# EAGLE board PCB (EAGLE 9.6.2)
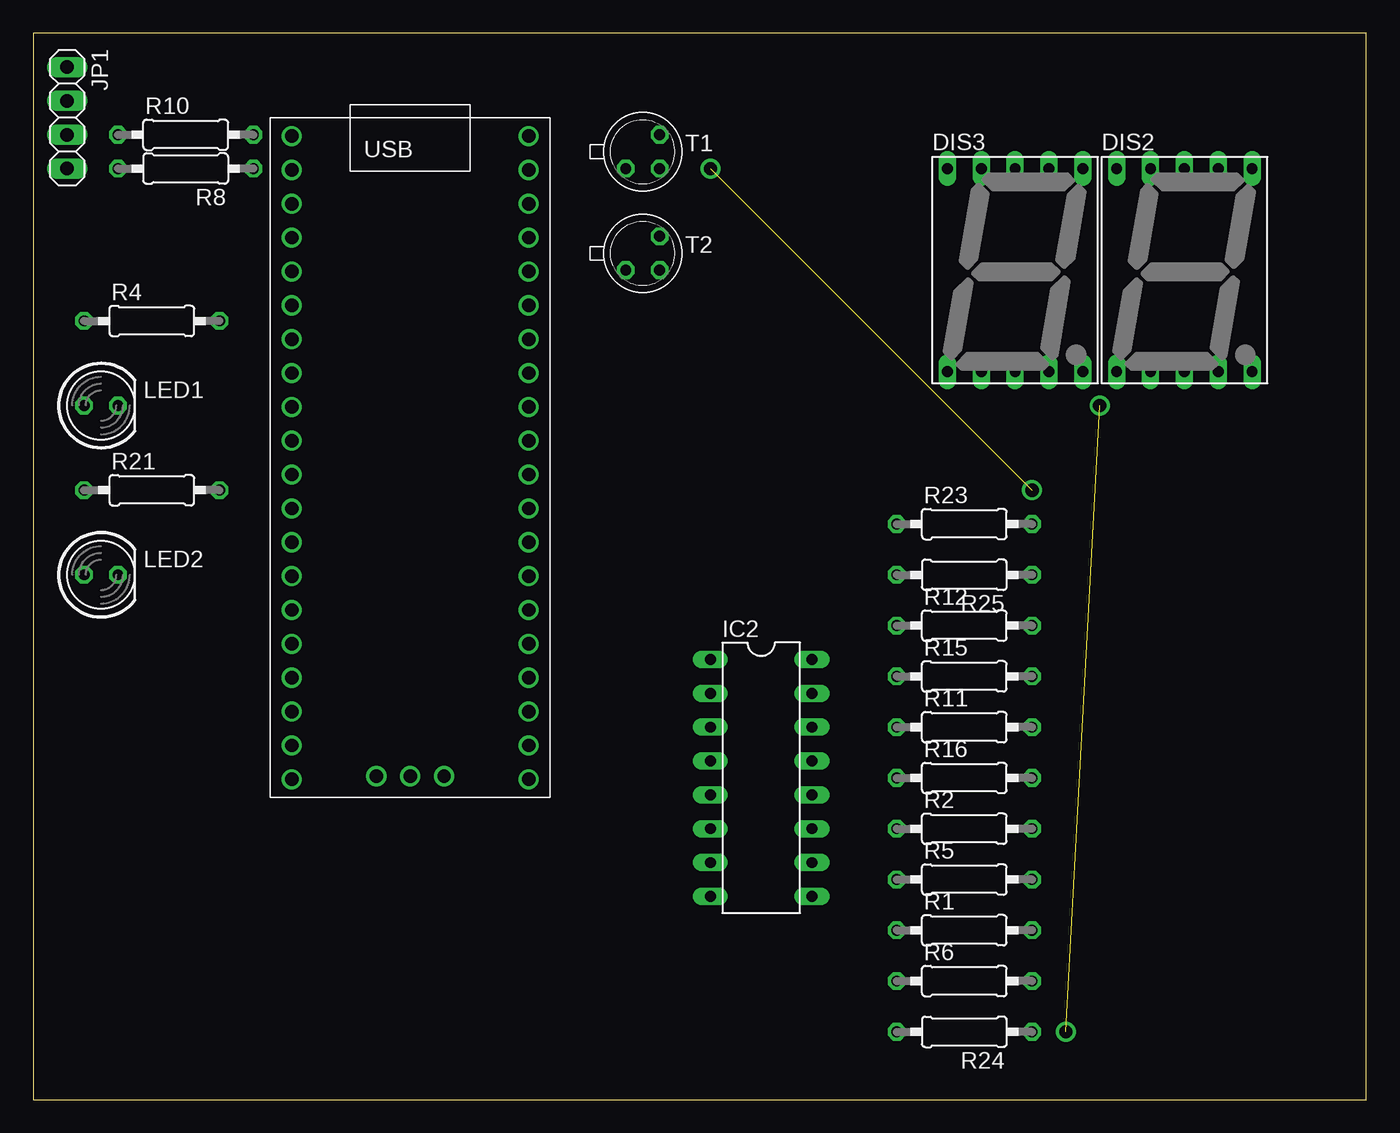
[diagram p0: board, top side]
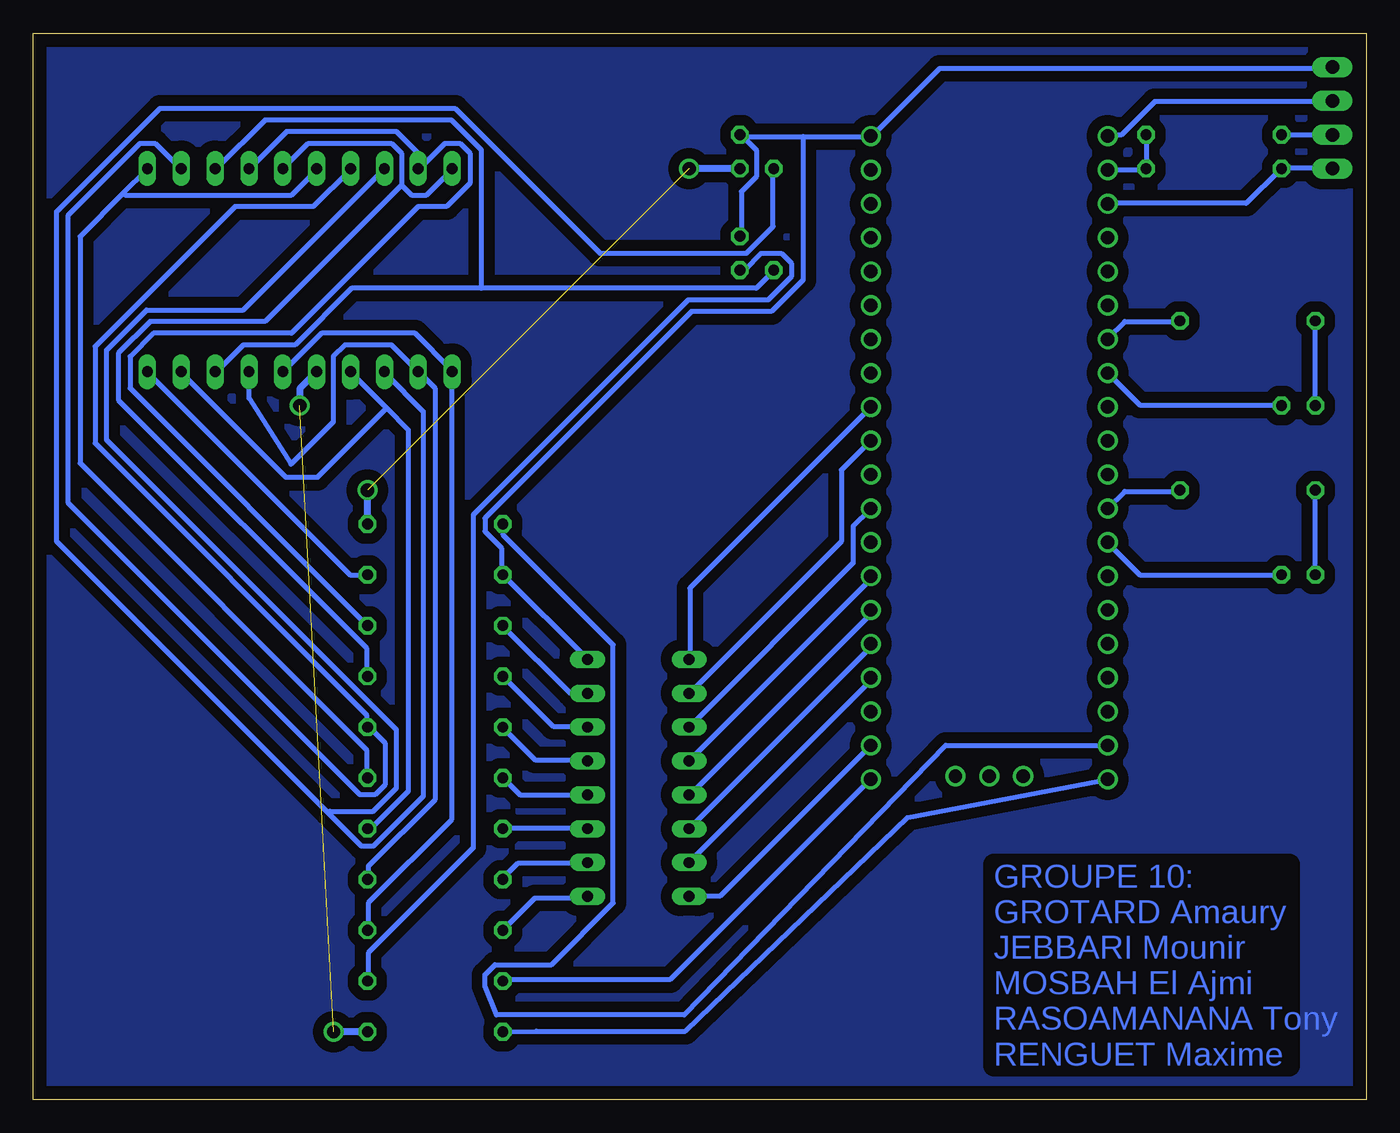
[diagram p1: board, bottom side, seen from below]

Size 100 x 80 mm. Coordinates in mm from the lower left corner, seen from the top.
Outline: 0,0 100,0 100,80 0,80 0,0
Copper layers (1*16): Top 0.035mm / dielectric 1.5mm / Bottom 0.035mm
Design rules "default *": minimum track width 15mil, minimum drill 0.35mm, track to track 15mil, track to pad 15mil, pad to pad 15mil, via to via 15mil, smd to smd 6mil, copper to edge 40mil, drill to drill 6mil, minimum pad ring 10mil, minimum via ring 8mil, stop-mask expansion 4mil, vias tented up to drill 0mil, thermal gap 10mil

## Footprints (pad centres in the part's own frame; a part is rotated, then mirrored left to right if it is on the bottom)
HDSP-M = drill 0.813 long: 1 -5.08,-7.62; 2 -2.54,-7.62; 3 0,-7.62; 4 2.54,-7.62; 5 5.08,-7.62; 6 5.08,7.62; 7 2.54,7.62; 8 0,7.62; 9 -2.54,7.62; 10 -5.08,7.62
DIL16 = drill 0.813 long: 1 -8.89,-3.81; 2 -6.35,-3.81; 3 -3.81,-3.81; 4 -1.27,-3.81; 5 1.27,-3.81; 6 3.81,-3.81; 7 6.35,-3.81; 8 8.89,-3.81; 9 8.89,3.81; 10 6.35,3.81; 11 3.81,3.81; 12 1.27,3.81; 13 -1.27,3.81; 14 -3.81,3.81; 15 -6.35,3.81; 16 -8.89,3.81
1X04 = drill 1.016 long: 1 -3.81,0; 2 -1.27,0; 3 1.27,0; 4 3.81,0
LED5MM = drill 0.813 octagon: A -1.27,0; K 1.27,0
0207/10 = drill 0.813 octagon: 1 -5.08,0; 2 5.08,0
TO18 = drill 0.813 octagon: 1 -1.27,-1.27; 2 1.27,-1.27; 3 1.27,1.27
FT_RASPBERRY-PI-PICO_TH = drill 1: 1 -8.55,24.03; 2 -8.55,21.49; 3 -8.55,18.95; 4 -8.55,16.41; 5 -8.55,13.87; 6 -8.55,11.33; 7 -8.55,8.79; 8 -8.55,6.25; 9 -8.55,3.71; 10 -8.55,1.17; 11 -8.55,-1.37; 12 -8.55,-3.91; 13 -8.55,-6.45; 14 -8.55,-8.99; 15 -8.55,-11.53; 16 -8.55,-14.07; 17 -8.55,-16.61; 18 -8.55,-19.15; 19 -8.55,-21.69; 20 -8.55,-24.23; 21 9.23,-24.23; 22 9.23,-21.69; 23 9.23,-19.15; 24 9.23,-16.61; 25 9.23,-14.07; 26 9.23,-11.53; 27 9.23,-8.99; 28 9.23,-6.45; 29 9.23,-3.91; 30 9.23,-1.37; 31 9.23,1.17; 32 9.23,3.71; 33 9.23,6.25; 34 9.23,8.79; 35 9.23,11.33; 36 9.23,13.87; 37 9.23,16.41; 38 9.23,18.95; 39 9.23,21.49; 40 9.23,24.03; GND 0.34,-24; SWCLK -2.2,-24; SWDIO 2.88,-24

## Placement (x,y rotation side)
DIS2  HD-H101  [HDSP-M]  86.36,62.23 0 top
DIS3  HD-H101  [HDSP-M]  73.66,62.23 0 top
IC2  [DIL16]  54.61,24.13 270 top
JP1  [1X04]  2.54,73.66 270 top
LED1  [LED5MM]  5.08,52.07 0 top
LED2  [LED5MM]  5.08,39.37 0 top
R1  [0207/10]  69.85,12.7 0 top
R2  [0207/10]  69.85,20.32 0 top
R4  [0207/10]  8.89,58.42 0 top
R5  [0207/10]  69.85,16.51 0 top
R6  [0207/10]  69.85,8.89 0 top
R8  [0207/10]  11.43,69.85 180 top
R10  [0207/10]  11.43,72.39 0 top
R11  [0207/10]  69.85,27.94 0 top
R12  [0207/10]  69.85,35.56 0 top
R15  [0207/10]  69.85,31.75 0 top
R16  [0207/10]  69.85,24.13 0 top
R21  [0207/10]  8.89,45.72 0 top
R23  [0207/10]  69.85,43.18 0 top
R24  [0207/10]  69.85,5.08 180 top
R25  [0207/10]  69.85,39.37 180 top
T1  2N2222  [TO18]  45.72,71.12 0 top
T2  2N2222  [TO18]  45.72,63.5 0 top
U$1  RASPBERRY-PI-PICO_TH  [FT_RASPBERRY-PI-PICO_TH]  27.94,48.26 0 top

## Library data of the parts
DIS2 DIS3 = display-hp; OC_FARNELL: unknown; OC_NEWARK: unknown
IC2 = ic-package
JP1 = pinhead
LED1 LED2 = led
R1 R2 R4-R6 R8 R10-R12 R15 R16 R21 R23-R25 = rcl; SPICEPREFIX: R
T1 T2 = transistor
U$1 = pipico

## Nets
9E: DIS2.1 DIS3.1 R1.2
10D: DIS2.2 DIS3.2 R5.2
11C: DIS2.4 DIS3.4 R2.2
12B: DIS2.6 DIS3.6 R16.2
13A: DIS2.7 DIS3.7 R11.2
14G: DIS2.10 DIS3.10 R15.2
15F: DIS2.9 DIS3.9 R12.2
19TOTR: R23.1 U$1.19
DOT: R24.2 U$1.20
N$1: IC2.8 U$1.22
N$2: JP1.4 R8.2 U$1.3
N$3: R8.1 R10.2 U$1.2
N$4: JP1.2 U$1.1
N$5: JP1.3 R10.1
N$6: R4.2 U$1.7
N$7: LED1.A R4.1
N$8: LED1.K U$1.8
N$9: IC2.1 U$1.32
N$10: IC2.2 U$1.31
N$11: IC2.7 U$1.24
N$12: IC2.6 U$1.25
N$13: IC2.5 U$1.26
N$14: IC2.4 U$1.27
N$15: IC2.3 U$1.29
N$16: IC2.15 R12.1
N$17: IC2.14 R15.1
N$18: R6.1 U$1.21
N$19: IC2.13 R11.1
N$20: IC2.12 R16.1
N$21: IC2.11 R2.1
N$22: IC2.10 R5.1
N$23: IC2.9 R1.1
N$24: R23.2 T1.2
N$25: DIS3.3 DIS3.8 T1.1
N$26: R21.2 U$1.12
N$27: LED2.A R21.1
N$28: LED2.K U$1.13
N$29: DIS2.3 DIS2.8 T2.1
N$30: R6.2 T2.2
N$31: DIS2.5 R25.1
N$33: DIS3.5 R24.1
VCC: IC2.16 JP1.1 R25.2 T1.3 T2.3 U$1.40

## Tracks (layer width: path | path; a pad name or v marks a point on that pad's centre or on a via)
9E
  Bottom 0.381: R1.2 74.88,12.75 74.88,14.75 68.62,21 68.62,54.5 DIS3.1 68.62,54.75 71.38,57.5 78.38,57.5 81.25,54.62 DIS2.1
10D
  Bottom 0.381: R5.2 74.88,16.62 74.88,17.5 69.88,22.5 69.88,53.38 71,54.5 DIS3.2 71.25,54.75 73.12,56.62 76.62,56.62 77.5,55.75 77.5,50.84 80.67,47.66 83.82,52.61 DIS2.2
11C
  Bottom 0.381: 73.5,51.88 76.12,54.5 DIS3.4 | 73.5,51.88 71.88,50.25 71.88,23.12 74.62,20.38 74.88,20.38 R2.2 | DIS2.4 88.88,54.5 81.05,46.67 78.7,46.67 73.5,51.88
12B
  Bottom 0.381: 93.25,68 91.5,69.75 DIS2.6 | 93.25,68 96.5,64.75 96.5,47.75 75,26.25 75,24.25 R16.2 | DIS3.6 78.75,69.75 80.62,67.88 93.12,67.88 93.25,68
13A
  Bottom 0.381: DIS3.7 76.25,69.75 79,67 84.88,67 95.38,56.5 95.38,49.25 75,28.88 75,28 R11.2 74.75,27.88 73.62,26.75 73.62,23.62 74.38,22.88 75.5,22.88 97.38,44.75 97.38,66.38 92,71.75 90.88,71.75 89,69.88 DIS2.7
14G
  Bottom 0.381: 72.38,68.62 71.62,67.88 70.5,67.88 68.62,69.75 DIS3.10 | 72.38,68.62 72.38,71 73.12,71.75 79.38,71.75 81.25,69.88 DIS2.10 | 72.38,68.62 82.62,58.38 91.25,58.38 93.62,56 93.62,52.5 75,33.88 75,31.75 R15.2
15F
  Bottom 0.381: R12.2 75,35.62 92.75,53.38 92.75,55.75 91,57.5 80.62,57.5 71.12,67 69,67 67.25,68.75 67.25,71 68,71.75 69.12,71.75 71,69.88 DIS3.9 70.62,70.5 72.75,72.62 81,72.62 83.75,69.88 DIS2.9
19TOTR
  Bottom 0.381: R23.1 64.75,43.12 64.75,42.38 56.5,34.12 56.5,14.75 61.12,10.12 65.38,10.12 66.12,9.38 66.12,8.5 65.25,6.36 51.16,6.36 31.55,26.57 U$1.19
DOT
  Bottom 0.381: R24.2 62.27,5.12 51.08,5.12 34.39,21.17 U$1.20
GND
  pour Bottom (isolate 0.8): 0,0 0,80.01 100.33,80.01 100.33,0
N$1
  Bottom 0.381: IC2.8 50.75,15.25 48.5,15.25 37.25,26.5 U$1.22
N$2
  Bottom 0.381: JP1.4 2.62,69.88 6.25,69.88 R8.2 6.5,69.75 9,67.25 19.38,67.25 U$1.3
N$3
  Bottom 0.381: R10.2 16.5,72.38 16.5,69.88 R8.1 16.62,69.75 U$1.2
N$4
  Bottom 0.381: U$1.1 19.38,72.38 18.38,72.38 15.88,74.88 2.62,74.88 JP1.2
N$5
  Bottom 0.381: R10.1 6.25,72.38 2.62,72.38 JP1.3
N$6
  Bottom 0.381: R4.2 14,58.38 18.12,58.38 19.38,57.12 U$1.7
N$7
  Bottom 0.381: LED1.A 3.88,52.12 3.88,58.38 R4.1
N$8
  Bottom 0.381: LED1.K 6.38,52.12 17,52.12 19.38,54.5 U$1.8
N$9
  Bottom 0.381: IC2.1 50.75,33.12 50.75,38.38 37.25,51.88 U$1.32
N$10
  Bottom 0.381: IC2.2 50.75,30.5 39.38,41.88 39.38,47.25 37.25,49.38 U$1.31
N$11
  Bottom 0.381: IC2.7 50.75,17.88 37.25,31.38 37.25,31.62 U$1.24
N$12
  Bottom 0.381: IC2.6 50.75,20.38 37.25,33.88 37.25,34.12 U$1.25
N$13
  Bottom 0.381: IC2.5 50.75,22.88 37.25,36.38 37.25,36.62 U$1.26
N$14
  Bottom 0.381: IC2.4 50.75,25.5 37.25,39 37.25,39.25 U$1.27
N$15
  Bottom 0.381: IC2.3 50.75,28 38.5,40.25 38.5,43 37.25,44.25 U$1.29
N$16
  Bottom 0.381: IC2.15 58.5,30.5 59.75,30.5 64.75,35.5 R12.1
N$17
  Bottom 0.381: IC2.14 58.5,28 61,28 64.75,31.75 R15.1
N$18
  Bottom 0.381: R6.1 64.75,9 52.25,9 37.25,24 U$1.21
N$19
  Bottom 0.381: IC2.13 58.5,25.5 62.38,25.5 64.75,27.88 R11.1
N$20
  Bottom 0.381: IC2.12 58.5,22.88 63.5,22.88 64.75,24.12 R16.1
N$21
  Bottom 0.381: IC2.11 58.5,20.38 64.75,20.38 R2.1
N$22
  Bottom 0.381: IC2.10 58.5,17.75 63.62,17.75 64.75,16.62 R5.1
N$23
  Bottom 0.381: IC2.9 58.5,15.12 62.38,15.12 64.75,12.75 R1.1
N$24  (1 unrouted)
  Bottom 0.508: R23.2 74.93,45.72 | T1.2 50.8,69.85
N$25
  Bottom 0.381: 77.88,21.5 75.38,19 74.5,19 70.75,22.75 70.75,51.62 73.62,54.5 DIS3.3 | 77.88,21.5 98.25,41.88 98.25,66.62 90.5,74.38 68.38,74.38 57.5,63.5 46.5,63.5 44.5,65.5 44.5,69.75 T1.1 | DIS3.8 73.75,69.75 84.25,59.25 91.5,59.25 94.5,56.25 94.5,49.5 72.75,27.75 72.75,23.38 74.5,21.62 77.75,21.62 77.88,21.5
N$26
  Bottom 0.381: R21.2 14,45.62 18.12,45.62 19.38,44.38 U$1.12
N$27
  Bottom 0.381: LED2.A 3.88,39.38 3.88,45.62 R21.1
N$28
  Bottom 0.381: LED2.K 6.38,39.38 17,39.38 19.38,41.75 U$1.13
N$29
  Bottom 0.381: 66.38,60.88 45.75,60.88 44.5,62.12 T2.1 | 66.38,60.88 76.12,60.88 80.38,56.62 84.25,56.62 86.25,54.62 DIS2.3 | 66.38,60.88 66.38,71.25 68.62,73.5 82.62,73.5 86.25,69.88 DIS2.8
N$30
  Bottom 0.381: R6.2 74.88,9 74.88,11 67,18.88 67,43.88 50.88,60 44.88,60 43.12,61.75 43.12,62.75 43.88,63.5 45.38,63.5 46.62,62.25 46.88,62.25 T2.2
N$31
  Bottom 0.381: R25.1 75,39.38 76.25,39.38 91.38,54.5 DIS2.5
N$32  (via drill 1 pad 1.3)
  other vias: 50.8,69.85
N$33  (1 unrouted)
  Bottom 0.508: R24.1 77.47,5.08 | DIS3.5 80.01,53.34 80.01,52.07
N$34  (via drill 1 pad 1.3)
  other vias: 74.93,45.72
N$35  (via drill 1 pad 1.3)
  other vias: 77.47,5.08
N$37  (via drill 1 pad 1.3)
  other vias: 80.01,52.07
VCC
  Bottom 0.381: IC2.16 58.5,33.12 64.75,39.38 R25.2 64.88,39.5 64.88,41.38 66.12,42.62 66.12,43.62 50.62,59.12 44.62,59.12 42.25,61.5 42.25,72.25 | T2.3 46.88,64.88 46.88,68.12 45.75,69.25 45.75,71.25 46.88,72.38 T1.3 46.5,72.25 42.25,72.25 | 42.25,72.25 37.25,72.25 U$1.40 37,72.38 32,77.38 2.62,77.38 JP1.1

## Text on the board
Bottom: GROUPE 10: / GROTARD Amaury / JEBBARI Mounir / MOSBAH El Ajmi / RASOAMANANA Tony / RENGUET Maxime